# Altium PCB PCB_TUNDRA.PcbDoc
Units mil, origin at the board's own origin, x right, y up, seen from the top; angles counter-clockwise.
Board outline 2560 x 1205 mil, 4 copper layers (Top Layer, Mid-Layer 1, Mid-Layer 14, Bottom Layer); 133 components, 87 nets, 418 pads, 63 vias.
Unrouted connection lines stored in the file: 59.
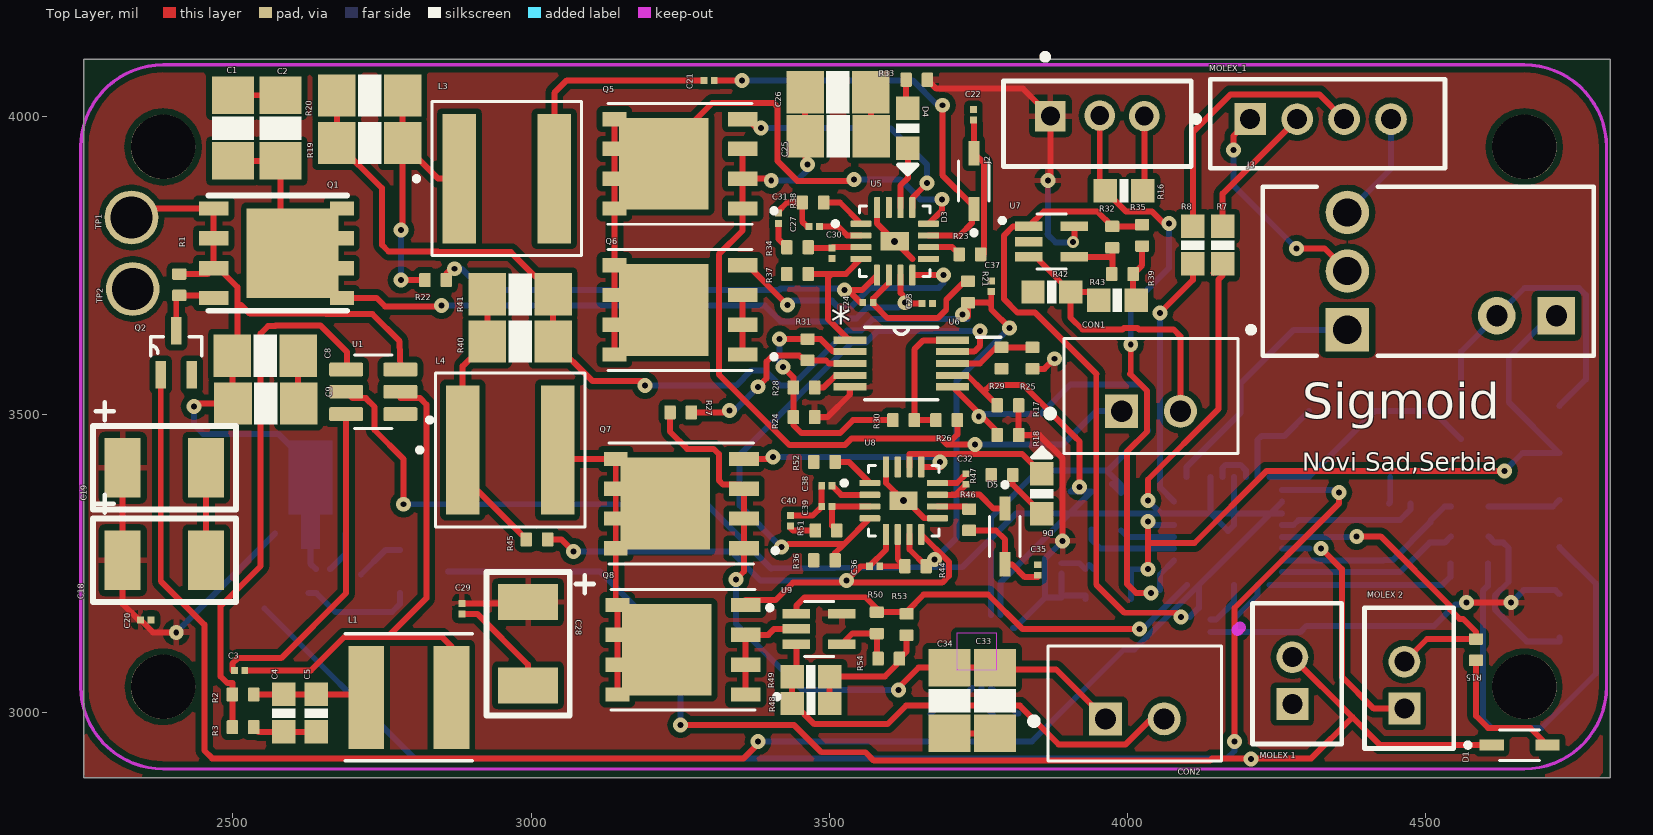
[diagram p0: Top Layer view]
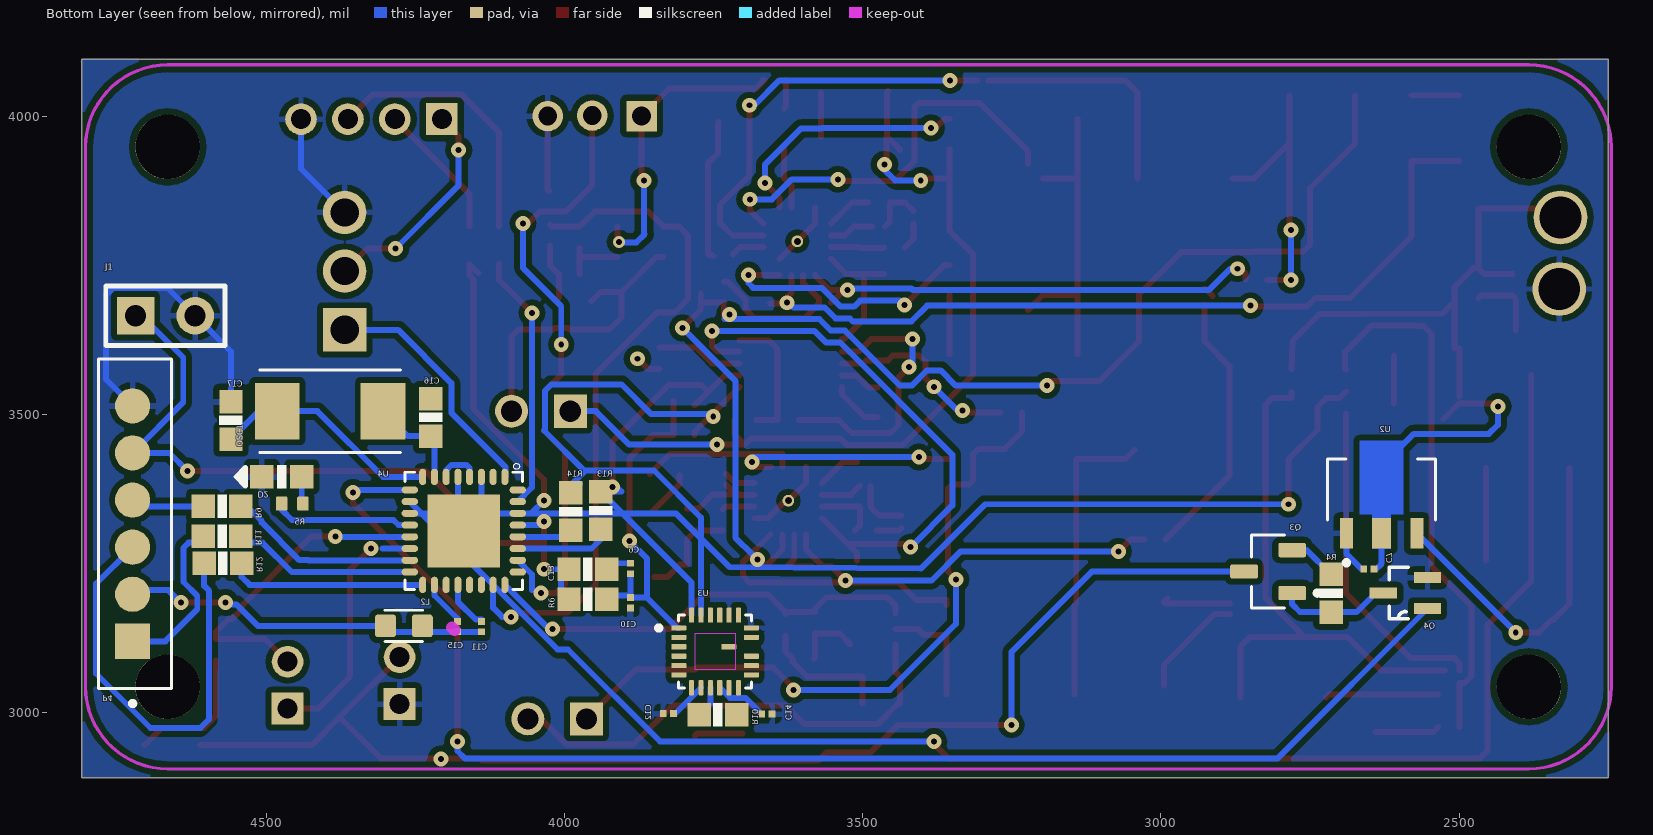
[diagram p1: Bottom Layer view, seen from below]
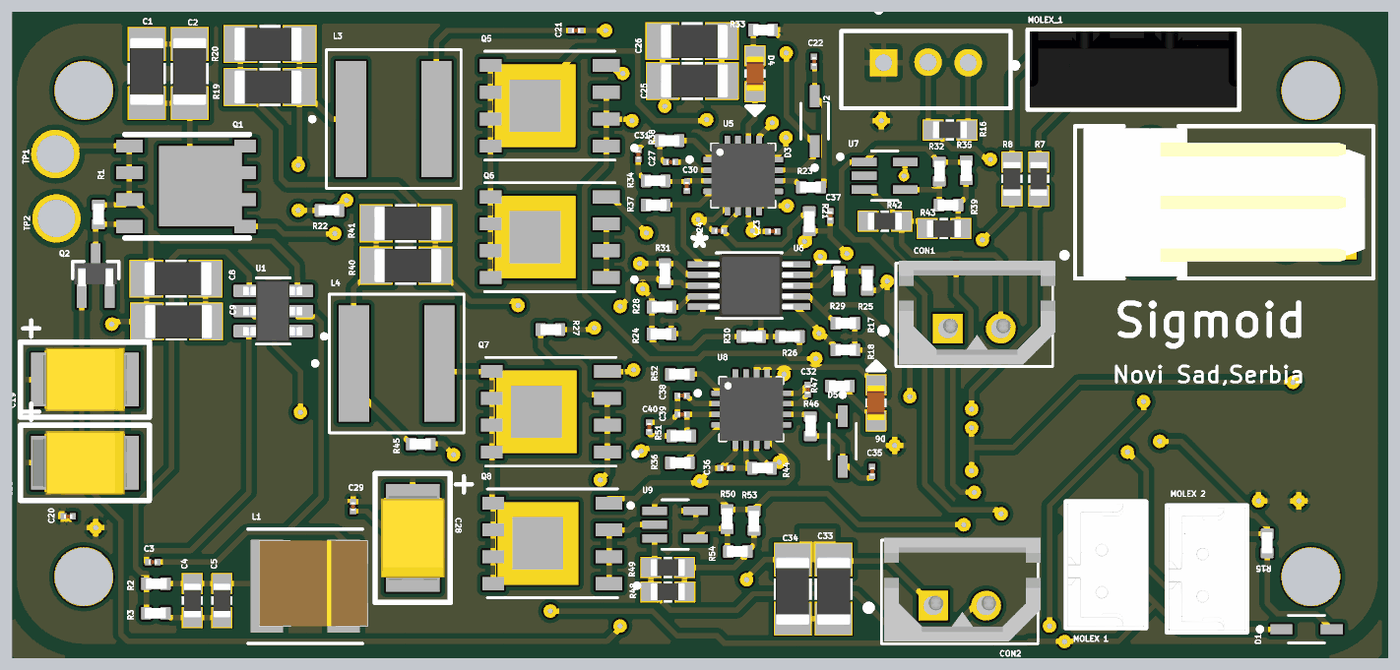
[diagram p2: 3D render of the assembled board from above, using the file's embedded part models]
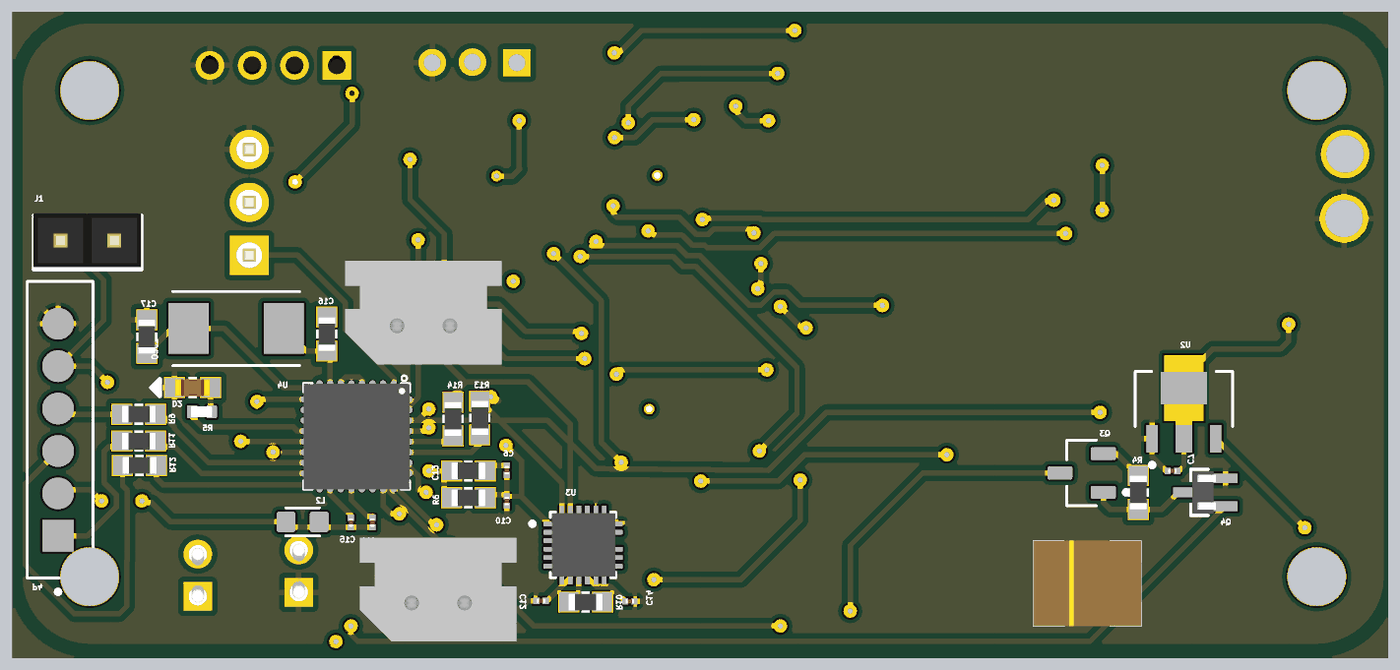
[diagram p3: 3D render of the assembled board from below, using the file's embedded part models]

## Layer stack, top to bottom
Top Solder: solder mask 0.4, Solder Resist, Dk 3.5
Top Layer: signal copper 1.4
Dielectric 1: dielectric 12.6, FR-4, Dk 4.8
Mid-Layer 1: signal copper 1.4
Dielectric3: dielectric 12.6, FR-4, Dk 4.8
Mid-Layer 14: signal copper 1.4
Dielectric2: dielectric 12.6, FR-4, Dk 4.8
Bottom Layer: signal copper 1.4
Bottom Solder: solder mask 0.4, Solder Resist, Dk 3.5

## Board outline
2250,4095 4810,4095 4810,2890 2250,2890 2250,4065 2250,4075

## Design rules (kind name [scope] priority, off if disabled: settings)
Clearance [All] p1: gap=10 ignorepadtopadclearanceinfootprint=FALSE except(0: Arc-Hole Track-Hole SMDPad-Hole THPad-Hole Via-Hole Fill-Hole Poly-Hole Region-Hole Text-Hole)
PolygonConnect [All] p1: connectstyle=Relief reliefconductorwidth=10 reliefentries=4 polygonreliefangle="90 Angle" airgapwidth=10
RoutingVias [All] p1: holewidth=28 width=50 viastyle="Through Hole" minholewidth=28 minwidth=50 maxholewidth=28 maxwidth=50
SolderMaskExpansion [All] p1: expansion=4
Width [All] p1: maxlimit=10 minlimit=10 preferedwidth=10
30 further rules are at their usual default settings.

## Classes and differential pairs
component class U_Power_supply: C1 C2 C3 C4 C5 C6 C7 C8 C9 CON1 CON2 D1 "MOLEX 1" Q1 Q2 Q3 Q4 R1 R2 R3 R4 TP1 TP2 U1 U2
component class U_CPU: C10 C11 C12 C13 C14 C15 C16 C17 C18 C19 C20 D2 J1 J2 J3 L2 "MOLEX 2" MOLEX_1 OSC1 P4 R5 R6 R7 R8 R9 R10 R11 R12 R13 R14 R15 R16 R17 R18 U3 U4
component class U_Buster_Controller: C21 C22 C23 C24 C25 C26 C27 C28 C29 C30 C31 C32 C33 C34 C35 C36 C37 C38 C39 C40 D3 D4 D5 D6 L3 L4 Q5 Q6 Q8 R19 R20 R22 R23 R24 R25 R26 R27 R28 R29 R30 R31 R32 R33 R34 R35 R36 R37 R38 R39 R40 R41 R42 R43 R44 R45 R46 R47 R48 R49 R50 R51 R52 R53 R54 U5 U6 U7 U8 U9

## Components (designator, comment, footprint, x,y, rotation, side; value= is the part's Value field where it differs from the comment)
C1 "SMD Capacitor" "Capacitor SMD 1206" 2500.09,3980.61 r270 top value=22u
C2 "SMD Capacitor" "Capacitor SMD 1206" 2580.09,3980.61 r270 top value=22u
C3 "GRM0225C1E4R6CA03L_1" CAPC0402X22N 2511.26,3070 r180 top value=100n
C4 "SMD Capacitor" "Capacitor SMD 0603" 2585.08,2998.28 r90 top value=22u
C5 "SMD Capacitor" "Capacitor SMD 0603" 2640.08,2998.28 r90 top value=22u
C6 "GRM0225C1E4R6CA03L_1" CAPC0402X22N 3890,3241.26 r90 bottom value=1u
C7 "GRM0225C1E4R6CA03L_1" CAPC0402X22N 2651.26,3240 r0 bottom value=1u
C8 "SMD Capacitor" "Capacitor SMD 1206" 2555,3598 r180 top value=22u
C9 "SMD Capacitor" "Capacitor SMD 1206" 2556,3518 r180 top value=22u
C10 "GRM0225C1E4R6CA03L_1" CAPC0402X22N 3890,3183.74 r270 bottom value=0.1u
C11 "GRM0225C1E4R6CA03L_1" CAPC0402X22N 4140,3143.74 r270 bottom value=100n
C12 "GRM0225C1E4R6CA03L_1" CAPC0402X22N 3826.26,2998 r0 bottom value=10n
C13 "SMD Capacitor" "Capacitor SMD 0603" 3961.27,3240.08 r0 bottom value=100n
C14 "GRM0225C1E4R6CA03L_1" CAPC0402X22N 3661,2997 r180 bottom value=0.1u
C15 "GRM0225C1E4R6CA03L_1" CAPC0402X22N 4180,3143.74 r270 bottom value=100n
C16 "SMD Capacitor" "Capacitor SMD 0603" 4225,3495 r270 bottom value=22p
C17 "SMD Capacitor" "Capacitor SMD 0603" 4560,3490 r270 bottom value=22p
C18 "SMD Tantalum Capacitor (B)" "B Size Capacitor" 2315,3255 r0 top value=1uF
C19 "SMD Tantalum Capacitor (B)" "B Size Capacitor" 2315,3410 r0 top value=1uF
C20 "GRM0225C1E4R6CA03L_1" CAPC0402X22N 2353.74,3155 r0 top value=100n
C21 "GRM0225C1E4R6CA03L_1" CAPC0402X22N 3298.74,4060 r0 top value=100n
C22 "GRM0225C1E4R6CA03L_1" CAPC0402X22N 3742,4002.26 r90 top value=10u
C23 "GRM0225C1E4R6CA03L_1" CAPC0402X22N 3664.74,3686 r0 top value=100n
C24 "GRM0225C1E4R6CA03L_1" CAPC0402X22N 3565.26,3687 r180 top value=100p
C25 "SMD Capacitor" "Capacitor SMD 1206" 3516,3966 r180 top value=10u
C26 "SMD Capacitor" "Capacitor SMD 1206" 3515.61,4039.91 r180 top value=10u
C27 "GRM0225C1E4R6CA03L_1" CAPC0402X22N 3475,3815 r180 top value=4n7
C28 "SMD Tantalum Capacitor (B)" "B Size Capacitor" 2995,3185 r270 top value=10uF
C29 "GRM0225C1E4R6CA03L_1" CAPC0402X22N 2884,3173.74 r270 top value=0.1u
C30 "GRM0225C1E4R6CA03L_1" CAPC0402X22N 3505,3770 r270 top value=270p
C31 "GRM0225C1E4R6CA03L_1" CAPC0402X22N 3415,3828.74 r90 top value=4n7
C32 "GRM0225C1E4R6CA03L_1" CAPC0402X22N 3730,3391.26 r270 top value=100n
C33 "SMD Capacitor" "Capacitor SMD 1206" 3778.2,3019 r90 top value=10u
C34 "SMD Capacitor" "Capacitor SMD 1206" 3702,3019 r90 top value=10u
C35 "GRM0225C1E4R6CA03L_1" CAPC0402X22N 3850,3238.74 r90 top value=10u
C36 "GRM0225C1E4R6CA03L_1" CAPC0402X22N 3576.26,3245 r180 top value=100p
C37 "GRM0225C1E4R6CA03L_1" CAPC0402X22N 3772,3714.74 r90 top value=100n
C38 "GRM0225C1E4R6CA03L_1" CAPC0402X22N 3496.26,3380 r180 top value=4n7
C39 "GRM0225C1E4R6CA03L_1" CAPC0402X22N 3496.26,3345 r180 top value=270p
C40 "GRM0225C1E4R6CA03L_1" CAPC0402X22N 3435,3321.26 r90 top value=4n7
CON1 "MOLEX_22_03_5025" MOLEX_22-03-5025 4040,3505 r0 top
CON2 "MOLEX_22_03_5025" MOLEX_22-03-5025 4012.79,2989 r0 top
D1 "SD12-7" SOD323 4658.15,2945 r0 top
D2 "SMD LED" "SMD LED Diode" 4475,3395 r0 bottom
D3 "BO540WS-7" SOD323 3743,3891 r90 top
D4 "SMD LED" "SMD LED Diode" 3631.96,3979.24 r270 top
D5 "B054WS-7" SOD323 3795,3295 r270 top
D6 "SMD LED" "SMD LED Diode" 3857.04,3366.83 r90 top
J1 "Jumper 2 Pole" "Jumper 2 Pole" 4670,3665 r180 bottom
J2 "53253-0370" Molex_53253-0370_0 3950,4000 r0 top
J3 "SERVO CONNECTOR" Molex_22-05-1032_0 4505,3740 r270 top
L1 "SRN5040TA-150M" IND_A-150M 2795,3025 r0 top
L2 "XAL6060-472ME" INDC1608X95N 4269.91,3145 r180 bottom value=10u
L3 "XAL6060-472ME" IND_XAL6060-472ME 2959.53,3895 r0 top value=4u7
L4 "XAL6060-472ME" IND_XAL6060-472ME 2965,3440 r0 top value=4u7
"MOLEX 1" "CONN HEADER VERT 2POS 2MM" TE_Connectivity_0_MFG 4285,3065 r90 top
"MOLEX 2" "CONN HEADER VERT 2POS 2MM" TE_Connectivity_0_MFG 4472.87,3057.44 r90 top
MOLEX_1 "292161-4" TE_292161-4_0 4336.18,3987.13 r0 top
OSC1 "SMD Crystal Oscillator" XTAL_ECS-080-18-23G-JGN-TR 4393.58,3505 r0 bottom value=8MHz
P4 "ICSP PROGRAMMING" "ICSP Programming 6X1 (2mm)" 4725,3119.02 r90 bottom
Q1 "SI7149ADP-T1-GE3" POWERPAKSO-8 2575.3,3770 r0 top
Q2 "BSS138PW,115" SOT65P210X110-3N 2405,3603 r90 top
Q3 "DMG2305UX-7" "SOT91P240X110-3N_DMG2305UX-7 - duplicate" 2820.35,3236.02 r0 bottom
Q4 "BSS138PW,115" SOT65P210X110-3N 2590,3200 r0 bottom
Q5 "SIR184DP-T1-RE3" TRANS_SIR184DP-T1-RE3 3250,3920 r180 top
Q6 "SIR184DP-T1-RE3" TRANS_SIR184DP-T1-RE3 3250,3675 r180 top
Q7 "SIR184DP-T1-RE3" TRANS_SIR184DP-T1-RE3 3252.17,3350 r180 top
Q8 "SIR184DP-T1-RE3" TRANS_SIR184DP-T1-RE3 3255,3105 r180 top
R1 "SMD Resistor" RESC1005X35N 2410,3717.09 r90 top
R2 "SMD Resistor" RESC1005X35N 2517.09,3030 r0 top value=56k
R3 "SMD Resistor" RESC1005X35N 2517.09,2975 r180 top value=10k
R4 "SMD Resistor" "Resistor SMD 0603" 2715,3200 r270 bottom value=105k
R5 "SMD Resistor" RESC1005X35N 4457.09,3350 r0 bottom value=330R
R6 "SMD Resistor" "Resistor SMD 0603" 3961.81,3189.74 r180 bottom
R7 "SMD Resistor" "Resistor SMD 0603" 4160.26,3783.19 r90 top value=100R
R8 "SMD Resistor" "Resistor SMD 0603" 4110.26,3783.19 r90 top value=100R
R9 "SMD Resistor" "Resistor SMD 0603" 4575,3345 r180 bottom value=100R
R10 "SMD Resistor" "Resistor SMD 0603" 3743,2996 r0 bottom value=10k
R11 "SMD Resistor" "Resistor SMD 0603" 4575,3295 r180 bottom value=100R
R12 "SMD Resistor" "Resistor SMD 0603" 4573.82,3249.74 r180 bottom value=100R
R13 "SMD Resistor" "Resistor SMD 0603" 3940.26,3338.82 r270 bottom value=100R
R14 "SMD Resistor" "Resistor SMD 0603" 3990.26,3336.81 r270 bottom value=100R
R15 "SMD Resistor" RESC1005X35N 4585,3105 r90 top value=6.8k
R16 "SMD Resistor" "Resistor SMD 0603" 3995,3875 r180 top value={value}
R17 "SMD Resistor" RESC1005X35N 3800,3515 r0 top value=4.7k
R18 "SMD Resistor" RESC1005X35N 3800,3465 r0 top value=4.7k
R19 "SMD Resistor" "Resistor SMD 1206" 2730,3955 r0 top value=10m
R20 "SMD Resistor" "Resistor SMD 1206" 2730,4035 r0 top value=10m
R21 "SMD Resistor" RESC1005X35N 3733,3705 r270 top value=10R
R22 "SMD Resistor" RESC1005X35N 2840,3725 r180 top value=10R
R23 "SMD Resistor" RESC1005X35N 3736.14,3768.23 r180 top value=2R
R24 "SMD Resistor" RESC1005X35N 3457.91,3495 r180 top value=10k
R25 "SMD Resistor" RESC1005X35N 3841,3594.09 r90 top value=10k
R26 "SMD Resistor" RESC1005X35N 3697.09,3490 r180 top value=160k
R27 "SMD Resistor" RESC1005X35N 3251.09,3503 r0 top value=160k
R28 "SMD Resistor" RESC1005X35N 3457.91,3545 r0 top value=10k
R29 "SMD Resistor" RESC1005X35N 3789,3594.09 r270 top value=10k
R30 "SMD Resistor" RESC1005X35N 3625,3490 r0 top value=0R
R31 "SMD Resistor" RESC1005X35N 3464,3608.09 r270 top value=0R
R32 "SMD Resistor" RESC1005X35N 3975,3797.09 r90 top value=47k
R33 "SMD Resistor" RESC1005X35N 3647,4061 r0 top value=330R
R34 "SMD Resistor" RESC1005X35N 3447.09,3735 r0 top value=11k
R35 "SMD Resistor" RESC1005X35N 4025,3800 r270 top value=10k
R36 "SMD Resistor" RESC1005X35N 3492.09,3255 r0 top value=11k
R37 "SMD Resistor" RESC1005X35N 3447.09,3780 r180 top value=6k8
R38 "SMD Resistor" RESC1005X35N 3472.91,3855 r180 top value=105k
R39 "SMD Resistor" RESC1005X35N 3992.09,3735 r180 top value=1k2
R40 "SMD Resistor" "Resistor SMD 1206" 2981.39,3621.72 r180 top value=10m
R41 "SMD Resistor" "Resistor SMD 1206" 2981.39,3700.72 r180 top value=10m
R42 "SMD Resistor" "Resistor SMD 0603" 3873.19,3704.74 r0 top value=47m
R43 "SMD Resistor" "Resistor SMD 0603" 3983.82,3691.26 r180 top value=47m
R44 "SMD Resistor" RESC1005X35N 3645,3245 r0 top value=10R
R45 "SMD Resistor" RESC1005X35N 3010,3290 r180 top value=10R
R46 "SMD Resistor" RESC1005X35N 3735,3322.91 r90 top value=2R
R47 "SMD Resistor" RESC1005X35N 3790,3398.07 r180 top value=330R
R48 "SMD Resistor" "Resistor SMD 0603" 3470,3015 r180 top value=47m
R49 "SMD Resistor" "Resistor SMD 0603" 3469.81,3060.26 r180 top value=47m
R50 "SMD Resistor" RESC1005X35N 3580,3150 r90 top value=47k
R51 "SMD Resistor" RESC1005X35N 3495,3305 r180 top value=6k8
R52 "SMD Resistor" RESC1005X35N 3492.09,3420 r180 top value=105k
R53 "SMD Resistor" RESC1005X35N 3630,3147.09 r270 top value=10k
R54 "SMD Resistor" RESC1005X35N 3600,3090 r180 top value=1k2
TP1 "Test Point" "TEST POINT" 2330,3830 r0 top
TP2 "Test Point" "TEST POINT" 2332,3710 r0 top
U1 "TPS562208DDCT" SOT95P280X110-6N 2735.47,3537.6 r180 top
U2 "AP7380-33Y-13" VREG_AP7380-33Y-13 2630,3365 r90 bottom
U3 "MPU-9250" QFN40P300X300X105-24N 3748,3102 r180 bottom
U4 "ATMEGA328P-MU" QFN50P500X500X100-33N 4169.45,3304.21 r270 bottom
U5 "TPS43060RTER" QFN50P300X300X80-17N 3610,3790 r0 top
U6 "AD5243" SOP50P490X110-10N 3621,3585 r0 top
U7 "MCP6421" SOT65P210X110-5N 3873.19,3789.41 r0 top
U8 "TPS43060RTER" QFN50P300X300X80-17N 3625,3355 r0 top
U9 "MCP6421" SOT65P210X110-5N 3483.19,3140 r0 top

## Footprints (in the part's own frame and the unit in brackets; to place one, negate y for a bottom-side part, rotate by r counter-clockwise, add the part's x,y. Pads: shape width x height; smd on the part's side, far side on the other; paste and mask are expansions set on the pad)
"B Size Capacitor" [mil] "SMD Tantalum Capacitor B Size"
  rect 60x100 smd: 1(0,0) 2(140,0)
  silkscreen extent -50,-70 190,110, body extent -28,-59 169,59, height 83
"Capacitor SMD 0603" [mm] "Capacitor SMD 0603"
  rect 1x1 smd paste-0.05 mask+0.05: 1(-0.794,0.002) 2(0.806,0.002)
  silkscreen extent -0.19,-0.5 0.21,0.5, body extent -0.79,-0.4 0.81,0.4, height 0.8
"Capacitor SMD 1206" [mm] "Capacitor SMD 1206"
  rect 1.6x1.8 smd paste-0.05 mask+0.05: 1(-1.381,-0.002) 2(1.419,-0.002)
  silkscreen extent -0.48,-0.9 0.52,0.9, body extent -1.68,-0.8 1.52,0.8, height 1.5
CAPC0402X22N [mm]
  rect 0.29x0.3 smd: 1(-0.222,0) 2(0.222,0)
  body extent -0.2,-0.1 0.2,0.1, height 0.22
"ICSP Programming 6X1 (2mm)" [mm]
  rect 1.5x1.5 smd: 1(0,0)
  round 1.5 smd: 2(2.007,0) 3(4.013,0) 4(6.02,0) 5(8.026,0) 6(10.033,0)
  silkscreen extent -2.75,-1.65 12.03,1.45
IND_A-150M [mil]
  rect 60x173 smd paste+0 mask+0: 1(-71.5,0) 2(71.5,0)
  silkscreen extent -106,-106 106,106, body extent -87,-75 116,86, height 102
IND_XAL6060-472ME [mm]
  rect 1.43x5.5 smd: 1(-2.02,0) 2(2.02,0)
  silkscreen extent -3.95,-3.28 3.18,3.28
INDC1608X95N [mm]
  rrect30% 0.9x0.97 smd: 1(-0.785,0) 2(0.785,0)
  silkscreen extent -0.8,-0.66 0.8,0.66
"Jumper 2 Pole" [mm] "Jumper 2 Pole"
  rect 1.6x1.6 hole 0.9 paste-0.05 mask+0.05: 1(-1.27,0.003)
  round 1.6 hole 0.9 paste-0.05 mask+0.05: 2(1.27,0.003)
  silkscreen extent -2.54,-1.27 2.54,1.27, body extent -2.55,-1.17 2.53,1.37, height 8.29
MOLEX_22-03-5025 [mm]
  rect 1.408x1.408 hole 0.9: 1(-1.25,0)
  round 1.408 hole 0.9: 2(1.25,0)
  silkscreen extent -4.44,-1.8 3.7,3.1, body extent -3.57,-1.69 3.83,3.21, height 2.95
Molex_22-05-1032_0 [mm]
  rect 1.85x1.85 hole 1.2 paste-1000 mask+0: 1(2.5,-3.45)
  round 1.85 hole 1.2 paste-1000 mask+0: 2(0,-3.45) 3(-2.5,-3.45)
  silkscreen extent -3.6,-7.67 3.6,7.05, body extent -3.7,-7.15 3.7,7.15, height 0.25
Molex_53253-0370_0 [mm]
  rect 1.3x1.3 hole 0.8 paste-1000 mask+0: 1(-2,0)
  round 1.3 hole 0.8 paste-1000 mask+0: 2(0.102,0.025) 3(2,0)
  silkscreen extent -4,-2.15 4,2.65
POWERPAKSO-8 [mm]
  rect 1.27x0.61 smd: 1(-2.732,1.905) 2(-2.732,0.635) 3(-2.732,-0.635) 4(-2.732,-1.905)
  rect 1.02x0.61 smd: 5(2.732,-1.905) 6(2.732,-0.635) 7(2.732,0.635) 8(2.732,1.905)
  rect 3.91x3.81 smd: 9(0.627,0)
  silkscreen extent -2.95,-2.45 2.95,2.45
QFN40P300X300X105-24N [mm]
  rrect25% 0.64x0.22 smd: 1(-1.545,1) 2(-1.545,0.6) 3(-1.545,0.2) 4(-1.545,-0.2) 5(-1.545,-0.6) 6(-1.545,-1) 13(1.545,-1) 14(1.545,-0.6) 15(1.545,-0.2) 16(0.584,0.203) 17(1.545,0.6) 18(1.545,1)
  rrect25% 0.22x0.64 smd: 7(-1,-1.545) 8(-0.6,-1.545) 9(-0.2,-1.545) 10(0.2,-1.545) 11(0.6,-1.545) 12(1,-1.545) 19(1,1.545) 20(0.6,1.545) 21(0.2,1.545) 22(-0.2,1.545) 23(-0.6,1.545) 24(-1,1.545)
  Keep-Out Layer region: 0.85,-0.77 -0.85,-0.77 -0.85,0.77 0.85,0.77
  Keep-Out Layer region: 0.85,-0.77 -0.85,-0.77 -0.85,0.77 0.85,0.77
  silkscreen extent -2.5,-1.55 1.55,1.55, body extent -1.47,-1.5 1.53,1.5, height 1
QFN50P300X300X80-17N [mm]
  rrect25% 0.89x0.26 smd: 1(-1.44,0.75) 2(-1.44,0.25) 3(-1.44,-0.25) 4(-1.44,-0.75) 9(1.44,-0.75) 10(1.44,-0.25) 11(1.44,0.25) 12(1.44,0.75)
  rrect25% 0.26x0.89 smd: 5(-0.75,-1.44) 6(-0.25,-1.44) 7(0.25,-1.44) 8(0.75,-1.44) 13(0.75,1.44) 14(0.25,1.44) 15(-0.25,1.44) 16(-0.75,1.44)
  rect 1.2x0.8 smd paste-2: 17(0,0)
  round 0.5 hole 0.3: 18(0,0)
  silkscreen extent -2.63,-1.5 1.5,1.5, body extent -1.5,-1.5 1.5,1.5, height 0.8
QFN50P500X500X100-33N [mm]
  oval 0.7x0.3 smd mask+0: 1(-2.3,1.75) 2(-2.3,1.25) 3(-2.3,0.75) 4(-2.3,0.25) 5(-2.3,-0.25) 6(-2.3,-0.75) 7(-2.3,-1.25) 8(-2.3,-1.75) 17(2.3,-1.75) 18(2.3,-1.25) 19(2.3,-0.75) 20(2.3,-0.25) 21(2.3,0.25) 22(2.3,0.75) 23(2.3,1.25) 24(2.3,1.75)
  oval 0.3x0.7 smd mask+0: 9(-1.75,-2.3) 10(-1.25,-2.3) 11(-0.75,-2.3) 12(-0.25,-2.3) 13(0.25,-2.3) 14(0.75,-2.3) 15(1.25,-2.3) 16(1.75,-2.3) 25(1.75,2.3) 26(1.25,2.3) 27(0.75,2.3) 28(0.25,2.3) 29(-0.25,2.3) 30(-0.75,2.3) 31(-1.25,2.3) 32(-1.75,2.3)
  rect 3.1x3.1 smd paste-3: 33(0,0)
  silkscreen extent -2.88,-2.5 2.5,2.5, body extent -2.5,-2.5 2.5,2.5, height 0.48
RESC1005X35N [mm]
  rrect20% 0.49x0.6 smd: 1(-0.455,0) 2(0.455,0)
  body extent -0.47,-0.25 0.53,0.25, height 0.18
"Resistor SMD 0603" [mm] "Resistor SMD 0603"
  rect 1x1 smd paste-0.05 mask+0.05: 1(-0.792,0.007) 2(0.808,0.007)
  silkscreen extent -0.19,-0.49 0.21,0.51, body extent -0.79,-0.39 0.81,0.41, height 0.8
"Resistor SMD 1206" [mm] "Resistor SMD 1206"
  rect 1.6x1.8 smd paste-0.05 mask+0.05: 1(-1.412,-0.007) 2(1.388,-0.007)
  silkscreen extent -0.51,-0.91 0.49,0.89, body extent -1.71,-0.81 1.49,0.79, height 1.5
"SMD LED Diode" [mm] "SMD LED (Red, Low Current Type)"
  rect 1x1 smd paste-0.05 mask+0.05: 1(-0.858,0.001) 2(0.842,0.001)
  silkscreen extent -0.21,-0.5 1.94,0.5, body extent -0.82,-0.4 0.8,0.4, height 1.1
SOD323 [mm]
  rect 1.04x0.46 smd: A(1.19,0) C(-1.19,0)
  silkscreen extent -2.3,-0.65 0.85,0.65
SOP50P490X110-10N [mil]
  rect 56x12 smd: 1(-86,39) 2(-86,20) 3(-86,0) 4(-86,-20) 5(-86,-39) 6(86,-39) 7(86,-20) 8(86,0) 9(86,20) 10(86,39)
  silkscreen extent -61,-61 167,61, body extent -93,-59 99,59, height 19
SOT65P210X110-3N [mil]
  rect 46x18 smd: 1(-37,26) 2(-37,-26) 3(37,0)
  silkscreen extent -5,-43 27,43, body extent -19,-39 24,39, height 41
SOT65P210X110-5N [mm]
  rect 1.17x0.4 smd: 1(-0.97,0.65) 2(-0.97,0) 3(-0.97,-0.65) 4(0.97,-0.65) 5(0.97,0.65)
  silkscreen extent -2.2,-1.17 0.63,1.17
"SOT91P240X110-3N_DMG2305UX-7 - duplicate" [mm]
  rrect25% 1.18x0.61 smd: 1(-1.025,0.915) 2(-1.025,-0.915) 3(1.025,0)
  silkscreen extent -2.2,-1.55 0.7,1.55
SOT95P280X110-6N [mm]
  rrect25% 1.45x0.59 smd: 1(-1.155,0.95) 2(-1.155,0) 3(-1.155,-0.95) 4(1.155,-0.95) 5(1.155,0) 6(1.155,0.95)
  silkscreen extent -2.5,-1.57 0.8,1.57, body extent -1.37,-1.45 1.43,1.45, height 1.1
TE_292161-4_0 [mm]
  rect 1.35x1.35 hole 0.85 paste-1000 mask+0: 1(-3.3,0.2)
  round 1.35 hole 0.85 paste-1000 mask+0: 2(-1.3,0.2) 3(0.7,0.2) 4(2.7,0.2)
  silkscreen extent -5.72,-1.9 5,1.9, body extent -5.1,-2 5.1,2, height 0.25
TE_Connectivity_0_MFG [mm]
  rect 1.35x1.35 hole 0.85 paste-1000 mask+0: 1(-1.3,0.2)
  round 1.35 hole 0.85 paste-1000 mask+0: 2(0.7,0.2)
  silkscreen extent -3,-1.9 3,1.9, body extent -3.1,-2 3.1,2, height 0.25
"TEST POINT" [mil] "Test point"
  round 90 hole 70 mask+1: 1(0,0)
TRANS_SIR184DP-T1-RE3 [mm]
  rect 1.27x0.61 smd: 1(-2.67,1.905) 2(-2.67,0.635) 3(-2.67,-0.635) 4(-2.67,-1.905)
  rect 1.02x0.61 smd: 5(2.795,-1.905) 6(2.795,-0.635) 7(2.795,0.635) 8(2.795,1.905)
  rect 3.81x3.91 smd paste-3: 9(0.69,0)
  silkscreen extent -4.1,-2.58 3.08,2.58
VREG_AP7380-33Y-13 [mm]
  rect 1.3x0.55 smd: 1(-1.65,1.5) 3(-1.65,-1.5)
  rect 1.3x0.8 smd: 2(-1.65,0)
  Top Layer region: 2.3,-0.925 -0.825,-0.925 -0.825,-0.4 -2.3,-0.4 -2.3,0.4 -0.825,0.4 -0.825,0.925 2.3,0.925
  silkscreen extent -3,-2.3 1.53,2.3
XTAL_ECS-080-18-23G-JGN-TR [mm]
  rect 1.9x2.4 smd: 1(-2.25,0) 2(2.25,0)
  silkscreen extent -3,-1.75 3,1.75

## Part data
C3 C6 C7 C10 C11 C12 C14 C15 C20 C21 C22 C23 C24 C27 C29 C30 C31 C32 C35 C36 C37 C38 C39 C40: "SMD Capacitor C0G(EIA) with Capacitance: 4.6pF Tol. 0.25pF. Rated Voltage: 25Vdc", Package=None, Availability=Unavailable, MP=GRM0225C1E4R6CA03L, Price=None
C18 C19 C28: library part "SMD Tantalum Capacitor (B)_1", Package="SMD 3528 (B)"
CON1 CON2: library part "KONEKTOR 2-POLNI_X8Y6", "KONEKTOR 2 MOLEX"
D1: library part MBRS340, "Diode, Signal, TVS, 12V, Unidir. (SOD323)", Package="DO-214 ON Semiconductor", Availability=Unavailable, DigiKey-Purchase-URL=https://snapeda.com/shop?store=DigiKey&id=1473135, MF="ON Semiconductor", MP=MBRS340, Price=None, SnapEDA_Link=https://www.snapeda.com/parts/MBRS340/ON%20Semiconductor/view-part/1473135/?ref=snap
D2 D4 D6: library part "SMD LED Diode", "SMD LED (Red, Low Current Type)"
D3: library part MBRS340, "Diode, Signal, Schottky  (SOD-323)", Package="DO-214 ON Semiconductor", Availability=Unavailable, DigiKey-Purchase-URL=https://snapeda.com/shop?store=DigiKey&id=1473135, MF="ON Semiconductor", MP=MBRS340, Price=None, SnapEDA_Link=https://www.snapeda.com/parts/MBRS340/ON%20Semiconductor/view-part/1473135/?ref=snap
D5: library part MBRS340, "Diode, Signa, Schottky (SOD-323)", Package="DO-214 ON Semiconductor", Availability=Unavailable, DigiKey-Purchase-URL=https://snapeda.com/shop?store=DigiKey&id=1473135, MF="ON Semiconductor", MP=MBRS340, Price=None, SnapEDA_Link=https://www.snapeda.com/parts/MBRS340/ON%20Semiconductor/view-part/1473135/?ref=snap
J3: library part 22-05-1032
L1: "Fixed Inductors 3.3uH 20% SMD 5040", =4.7u, Built_By=EMA_Matt, Copyright="Copyright (C) 2018 Accelerated Designs. All rights reserved", Manufacturer_Part_Number=SRN5040TA-150M, RefDes=RefDes, SourceLibrary=Bourns_Electronics_2019-12-18, Type=DEV, Vendor="Bourns Electronics"
L2 L3 L4: "Power inductor, shielded, 20% tol, SMT, RoHS, halogen f", Package=None, Availability=Unavailable, MP=XAL6060-472ME, Price=None
"MOLEX 1" "MOLEX 2": library part 53253-0270, "Connector Header Through Hole 2 position 0.079\" (2.00mm)"
MOLEX_1: "Post Header Assembly, 4 Position, Vertical, 2mm Pitch, DIP Standard Type"
P4: "POGO con6, pitch 2mm, Fi cc 1.5mm", Package=None, Availability=Unavailable, MP=2267063-6, Price=None
Q1: "P-Channel 30V 50A (Tc) 5W (Ta), 48W (Tc) Surface Mount PowerPAK® SO-8", Package="SO-8 Vishay", Availability=Good, Check_prices=https://www.snapeda.com/parts/SI7149ADP-T1-GE3/Vishay%20Siliconix/view-part/415842/?ref=eda, MF="Vishay Siliconix", MP=SI7149ADP-T1-GE3, Price=None, Purchase-URL=https://pricing.snapeda.com/search/part/SI7149ADP-T1-GE3/?ref=eda, SnapEDA_Link=https://www.snapeda.com/parts/SI7149ADP-T1-GE3/Vishay%20Siliconix/view-part/415842/?ref=snap
Q2 Q4: "N-Channel 60V 320mA _Ta_ 260mW _Ta_, 830mW _Tc_ Surface Mount SC-70", Package="SOT-323 NXP Semiconductors", Digi-Key_Part_Number=1727-1143-1-ND, Digi-Key_Purchase_URL=https://www.digikey.com/product-detail/en/nexperia-usa-inc/BSS138PW,115/1727-1143-1-ND/4162472?utm_source=snapeda&utm_medium=aggregator&utm_campaign=symbol, MF="Nexperia USA", MP=BSS138PW,115, SnapEDA_Link=https://www.snapeda.com/parts/BSS138PW%2C115/Nexperia%20USA%20Inc./view-part/209423/?ref=snap
Q3: "P-Channel 20V 4.2A _Ta_ 1.4W _Ta_ Surface Mount SOT-23", Package="TO-236-3 Power Analog Micro", Availability=Unavailable, MF="Power Analog Micro", MP=DMG2305UX-7, Price=None, SnapEDA_Link=https://www.snapeda.com/parts/DMG2305UX-7/Power%20Analog%20Micro/view-part/174848/?ref=snap
Q5 Q6 Q7 Q8: Package=None, Availability=Unavailable, MP=SIR184DP-T1-RE3, Price=None
TP1 TP2: "Test point"
U1: "4.5 V to 17 V input, 2 A output, synchronous step-down converter in FCCM mode 6-SOT-23-THIN -40 to 125", Package="SOT-23-THN-6 Texas Instruments", Availability=Good, DigiKey-Purchase-URL=https://snapeda.com/shop?store=DigiKey&id=652146, MF="Texas Instruments", Mouser-Purchase-URL=https://snapeda.com/shop?store=Mouser&id=652146, MP=TPS562208DDCT, Price=None, SnapEDA_Link=https://www.snapeda.com/parts/TPS562208DDCT/Texas%20Instruments/view-part/652146/?ref=snap, Texas_Instruments-Purchase-URL=https://snapeda.com/shop?store=Texas+Instruments&id=652146
U2: "LDO Regulator Pos 3.3V 0.15A 4-Pin(3+Tab) SOT-89 T/R", Package=None, Arrow_Electronics-Purchase-URL=https://snapeda.com/shop?store=Arrow+Electronics&id=4834117, Availability=Unavailable, MF="Diodes Incorporated", Mouser-Purchase-URL=https://snapeda.com/shop?store=Mouser&id=4834117, MP=AP7380-33Y-13, Price=None, SnapEDA_Link=https://www.snapeda.com/parts/AP7380-33Y-13/Diodes%20Inc./view-part/4834117/?ref=snap
U3: "Accelerometer, Gyroscope, Magnetometer, 9 Axis Sensor I²C, SPI Output", Package="TFQFN-24 TDK InvenSense", Availability=Unavailable, MF="TDK InvenSense", MP=MPU-9250, Price=None, SnapEDA_Link=https://www.snapeda.com/parts/MPU-9250/TDK%20InvenSense/view-part/4652549/?ref=snap
U4: "AVR AVR® ATmega Microcontroller IC 8-Bit 20MHz 32KB (16K x 16) FLASH 32-VQFN (5x5)", Package="VQFN-32 Microchip", Availability=Good, Check_prices=https://www.snapeda.com/parts/ATMEGA328P-MU/Microchip/view-part/649548/?ref=eda, MF=Microchip, MP=ATMEGA328P-MU, Price=None, Purchase-URL=https://pricing.snapeda.com/search/part/ATMEGA328P-MU/?ref=eda, SnapEDA_Link=https://www.snapeda.com/parts/ATMEGA328P-MU/Microchip/view-part/649548/?ref=snap
U5 U8: "Low Iq, 58V, Synchronous Boost Controller w/ Wide Input Voltage & 7.5V Gate Drive for Standard FETs 16-WQFN -40 to 150", Package="WQFN-16 Texas Instruments", Availability=Good, MF="Texas Instruments", MP=TPS43060RTER, Price=None, Purchase-URL=https://pricing.snapeda.com/search/part/TPS43060RTER/?ref=eda, SnapEDA_Link=https://www.snapeda.com/parts/TPS43060RTER/Texas%20Instruments/view-part/524817/?ref=snap
U6: library part AD5243BRMZ50-RL7, "Digital Digital Potentiometer 50k Ohm 2 Circuit 256 Taps I²C Interface 10-MSOP", Package="MSOP-10 Analog Devices", Availability=Unavailable, MF="Analog Devices", MP=AD5248BRMZ50-RL7, Price=None, SnapEDA_Link=https://www.snapeda.com/parts/AD5248BRMZ50-RL7/Analog%20Devices%20Inc./view-part/435262/?ref=snap
U7 U9: "General Purpose Amplifier 1 Circuit Rail-to-Rail SC70-5", Package="SOT-23-5 Analog Devices", Availability=Warning, MF="Analog Devices", Mouser-Purchase-URL=https://snapeda.com/shop?store=Mouser&id=4346571, MP=LTC2050HVCS5#TRMPBF, Price=None, SnapEDA_Link=https://www.snapeda.com/parts/LTC2050HVCS5%23TRMPBF/Analog%20Devices/view-part/4346571/?ref=snap
R1: 105k=105k
R6: =10k

## Free pads (board coordinates)
  round 108.27 hole 108.27: 1(2382.8,3042.79) 1(2382.8,3948.31) 1(4666.26,3042.79) 1(4666.26,3948.31)

## Via types
v1: diameter 25, hole 10, Top Layer to Bottom Layer, 62 vias
v2: diameter 20, hole 10, Top Layer to Bottom Layer, 1 vias

## Nets (pads, with @x,y where several pads share a name; then routed paths per layer and width w, separated by ;. In a path a pad name is that pad's centre, name@x,y a point inside that pad or via, vN(x,y) a via of type N, cw(c..) or ccw(c..) an arc to the next point about the centre after c; other vN are vias at no path point)
3V3: C6.1 C10.1 C11.2 C12.1 C18.1 C19.1 C20.1 C28.1 C29.1 J2.1 L2.1 P4.2 R6.2 R17.2 R18.2 R24.1 R25.1 R33.2 R47.2 U2.3 U3.1 U3.8 U3.13 U4.4 U4.6 U6.5 U7.5 U9.5 | length 2654.4
  Top Layer w10: C19.1 C18.1 2315,3181.77 C20.1@2341.77,3155 ; C20.1 2365.91,3134.09 v1(2405,3134.09) ; C29.1 2992.48,3182.48 C28.1 C28.1@2989.26,3190.74 ; R24.1 3497,3495 3535,3533 U6.5 ; R33.2@3668.66,4061 R33.2 3679.91,4046 3825.26,4046 J2.1 v1@3871.26,3892 ; R17.2@3817.91,3521.81 R17.2 R18.2 3852.58,3465 3891.69,3425.9 v1(3891.69,3287.31) ; R25.1 3861.17,3576.17 v1(3878,3593) ; v1@3866,3891 v1(3867,3892) ; v2(3909,3789) 3911.38,3791.38 U7.5 ; v1(4569,3184) v1(4644,3184)
  Bottom Layer w10: v1(2405,3134.09) U2.3 ; U3.8 3814.8,2998 C12.1 ; U3.1 3811.37,3141.37 3862.48,3192.48 ; v1(3867,3892) 3867,3803 3866,3802 3880,3788 v2@3906,3788 ; C10.1 3862.48,3192.48 ; C6.1 3890,3195.71 3930,3195.71 R6.2 ; v1(3891.69,3287.31) 3862.48,3258.11 3862.48,3192.48 ; C11.2 4290.81,3135 L2.1 4515,3145 4551,3181 v1@4566,3181 ; U4.4 4159.61,3409.61 4165,3415 4190,3415 4198.98,3406.02 U4.6 ; v1(4644,3184) 4665,3205 4718.03,3205 P4.2
5V: C4.2 C5.2 J3.2 L1.1 MOLEX_1.1 R2.2 | length 564.1
  Top Layer w10: R2.2 C4.2 C5.2 2718.5,3030 L1.1 ; v1(4178,3943) 4178,3966.74 MOLEX_1.1 ; v1(4284,3778) 4331.17,3778 J3.2
  Bottom Layer w10: v1(4178,3943) 4178,3884 v1(4284,3778)
A1: R24.2 R28.1 R30.1 R31.1 U6.2 | length 461.9
  Top Layer w10: v1(3417,3626) R31.1 3486,3626 3507,3605 U6.2 ; v1@3423,3578.5 3423.5,3578.5 3440,3562 R28.1 R24.2 3440,3482 3453.81,3468.19 3518.19,3468.19 3540,3490 R30.1
  Bottom Layer w10: v1(3417,3626) 3417,3585 v1(3423,3579)
A2: R25.2 R29.1 U6.8 | length 145.2
  Top Layer w10: U6.8 3753,3585 3780,3612 R29.1 R25.2
AREF: C11.1 U4.20 | length 79.7
  Bottom Layer w10: C11.1@4140,3155.71 4149.29,3155.71 4179.29,3185.71 U4.20
AVCC: C15.1 L2.2 U4.18 | length 74
  Bottom Layer w10: C15.1@4180,3155.71 4180,3157.25 4218.66,3195.91 U4.18
BOOT1: C21.2 D3.C U5.11 | length 699.9
  Top Layer w10: C21.2 v1(3354,4060) ; U5.11 3718.84,3799.84 3740.06,3821.06 3740.06,3850.84 3690,3900.89 v1(3690,4018.23)
  Bottom Layer w10: v1(3354,4060) 3640.06,4060 3681.83,4018.23 v1(3690,4018.23)
BOOT2: C32.2 D5.C U8.11 | length 153.9
  Top Layer w10: U8.11 3712.32,3364.84 C32.2 ; 3706.47,3365.47 3751.89,3365.47 3775.52,3341.85 D5.C
COMP1: C30.1 R37.1 U5.3 | length 89.4
  Top Layer w10: R37.1 3466.26,3778.74 C30.1 3506.42,3780.16 U5.3
COMP2: C39.1 R51.1 U8.3 | length 106.7
  Top Layer w10: R51.1 3505,3312.91 C39.1 3505.16,3345.16 U8.3
FB1: R34.2 U5.4 U6.1 | length 227
  Top Layer w10: R34.2 3504,3735 ; U6.1@3535,3626 3532,3626 3498.5,3659.5 3498.5,3729.5 3504,3735 ; U5.4 3528.33,3735.5 3504.5,3735.5 3504,3735
FB2: R36.2 U6.9 U8.4 | length 935.5
  Top Layer w10: 3431.92,3282.08 3524.92,3282.08 ; R36.2 3510,3267.17 3524.92,3282.08 ; U8.4 3524.92,3282.08 ; U6.9 3743.21,3605 3753.31,3615.09 v1(3753.31,3639.31)
  Bottom Layer w10: v1(3420,3277) 3350,3347 3350,3432 3538.5,3620.5 3562.24,3620.5 3581.05,3639.31 v1(3753.31,3639.31)
GND: "MOLEX 1.1" C1.1 C2.1 C4.1 C5.1 C6.2 C7.2 C8.1 C9.1 C10.2 C12.2 C13.1 C14.2 C15.2 C16.1 C17.1 C18.2 C19.2 C20.2 C22.2 C23.2 C25.1 C26.1 C27.2 C28.2 C29.2 C30.2 C31.2 C33.1 C34.1 C35.2 C37.2 C38.2 C39.2 C40.2 D1.A D2.2 J1.2 J2.3 J3.3 MOLEX_1.4 P4.6 Q2.2 Q4.2 Q6.1 Q6.2 Q6.3 Q8.1 Q8.2 Q8.3 R3.1 R10.1 R15.1 R16.1 R28.2 R29.2 R34.1 R35.2 R36.1 R38.2 R39.1 R42.1 R43.1 R48.1 R49.1 R52.2 R53.2 R54.1 TP2.1 U1.1 U2.1 U3.18 U3.20 U4.3 U4.5 U4.21 U4.33 U5.9 U5.16 U5.17 U6.4 U7.2 U8.9 U8.16 U8.17 U9.2 | length 3196.8
  Top Layer w10: C18.2 C19.2 ; C1.1 C2.1 ; R3.1 2542.99,2967.01 C4.1 C5.1 ; C8.1 2609.39,3519.09 C9.1 ; C29.2 2910,3165 2995,3080 C28.2 ; Q6.1 Q6.2 Q6.3 ; Q8.1 Q8.2 Q8.3 3398,3130 3408,3140 U9.2 ; C31.2@3415,3840.71 3429.29,3855 R38.2 3455,3823.03 C27.2@3463.03,3815 ; C40.2 3472.52,3330 C39.2 C38.2 ; R28.2 3491,3545 3511,3565 U6.4 ; R48.1 3500.99,3014.93 R49.1 3593.63,3060 3617.91,3084.29 R54.1 3630,3102.09 R53.2 ; C26.1 3570,3966.48 C25.1 ; U5.16 3580.47,3819.53 U5.17 ; U8.16 3595.47,3384.53 U8.17 ; 3659.53,3325.47 U8.9 ; C34.1 C33.1 C33.1@3781.46,2961.45 ; R43.1 4010,3696 R39.1 4025,3750 R35.2 ; R16.1 4028.74,3877.3 J2.3 ; R15.1 4585,2994 4605.35,2973.66 4676.35,2973.66 D1.A
  Bottom Layer w10: C7.2@2663.23,3240 2680.06,3256.83 2680.06,3257.08 2689.06,3266.08 U2.1 ; C6.2 3920,3250 C13.1 ; C13.1@3936.17,3247.48 C13.1@3943.73,3239.92 ; U4.3 4139.92,3333.74 U4.33 4179.29,3314.06 U4.5 ; J3.3 4442.48,3911.73 MOLEX_1.4 ; C17.1 4559.92,3605.05 J1.2 4666.48,3711.61 4757.69,3711.61 4769.3,3700 4769.3,3558.32 P4.6
GPIO_VN: "MOLEX 2.2" R15.2 U4.13 | length 542.8
  Top Layer w10: v1(4385,3295) 4425,3295 4541.5,3178.5 4541.5,3172.61 4557.61,3156.5 4563.5,3156.5 4585,3135 R15.2 4502.91,3122.91 4465,3085
  Bottom Layer w10: U4.13 4384.37,3294.37 v1(4385,3295)
GPIO_VP: "MOLEX 2.1" U4.14 | length 422.3
  Top Layer w10: v1(4325,3275) 4360,3240 4360,3060 4413.74,3006.26 4465,3006.26
  Bottom Layer w10: U4.14 4305.31,3274.68 ; 4305.31,3274.37 4305.63,3274.37 ; 4465,3006.26 4465,3026.2
HDRV1: Q5.4 U5.13 | length 417.2
  Top Layer w10: Q5.4 3363.34,3995 3380.34,3978 3381.85,3979.51 3383.36,3977.99 3383.99,3977.99 v1(3386,3980) ; U5.13 3639.53,3862.53 3658,3881 v1@3658,3882
  Bottom Layer w10: v1(3386,3980) 3568.97,3980 3569.46,3979.51 3603.49,3979.51 3664,3919 v1(3664,3888)
HDRV2: Q7.4 U8.13 | length 372.2
  Top Layer w10: Q7.4 v1@3404,3425 ; v1@3406,3424 v1(3406,3428) ; U8.13 3687.69,3411.69
  Bottom Layer w10: v1(3406,3428) 3683,3428 3691,3420
IN1+: CON1.2 R42.2 R43.2 U7.3 | length 518.6
  Top Layer w10: U7.3 3846.18,3763.82 R42.2 ; R43.2@3955,3690 3940,3705 R42.2 ; CON1.2 4089.21,3630.79 4078,3642 4019.89,3642 4017.39,3644.5 3994.61,3644.5 3992.11,3642 3925,3642 3905,3662 R42.2
IN2+: CON2.2 R48.2 R49.2 U9.3 | length 807.3
  Top Layer w10: U9.3 3445,3067 R49.2 3438,3014.93 R48.2 3440.6,3014.74 3475.28,2980.06 3597.95,2980.06 3629,3011.11 3819.95,3011.11 3884.77,2946.28 3997.5,2946.28 4051.11,2999.89 CON2.2
ISENS1+: C24.1 R21.1 U5.6 | length 263.5
  Top Layer w10: U5.6 3600.16,3720.16 3574,3694 C24.1 3574,3685 3598,3661 3682,3661 3696.5,3675.5 3696.5,3692.13 3727.29,3722.91 R21.1
ISENS1-: C24.2 R22.1 U5.5 | length 794
  Top Layer w10: R22.1 2857.91,3735.91 2866,3744 v1(2872,3744) ; v1(3526,3708) v1@3532.29,3708 ; C24.2@3553.29,3687 v1@3532.29,3708 ; U5.5 3555.17,3708 v1@3532.29,3708
  Bottom Layer w10: v1(2872,3744) 2884,3744 2920,3708 3416.11,3708 3418.61,3710.5 3523.5,3710.5 v1(3526,3708)
ISENS2+: C36.1 R44.1 U8.6 | length 100.3
  Top Layer w10: C36.1 R44.1 3615.16,3256.93 U8.6
ISENS2-: C36.2 R45.1 U8.5 | length 643.1
  Top Layer w10: R45.1 3051,3290 v1(3071,3270) ; v1(3529,3220.95) 3553.05,3245 C36.2 3595.47,3272.95 U8.5
  Bottom Layer w10: v1(3071,3270) 3335.89,3270 3384.94,3220.95 v1(3529,3220.95)
LDRV1: Q6.4 U5.8 | length 454.7
  Top Layer w10: Q6.4 3363.34,3750 3430.34,3683 v1(3430,3683) ; U5.8 v1(3692,3733.31)
  Bottom Layer w10: v1(3430,3683) 3437.5,3690.5 3504.61,3690.5 3514.61,3680.5 3537.39,3680.5 3568.89,3712 3684,3712 3692,3720 v1(3692,3733.31)
LDRV2: Q8.4 U8.8 | length 454.5
  Top Layer w10: Q8.4 3360.12,3188.46 3410.46,3188.46 3439.5,3217.5 3689.5,3217.5 3701,3229 3701,3252.27 U8.8@3654.96,3298.31
LED1-2-P: C25.2 C26.2 CON1.1 Q5.1 Q5.2 Q5.3 R26.1 | length 1475.5
  Top Layer w10: Q5.3 Q5.2 ; v1@3402,3895 Q5.2 ; C25.2@3437.56,3943.5 C25.2@3459.76,3965.71 ; C26.2@3457.76,4042.01 C26.2 C25.2@3459.76,3965.71 ; v1(3464,3919) 3460.15,3922.85 C25.2 C25.2@3459.76,3965.71 ; R26.1 3715,3466 3698,3449 ; v1(3745,3449) 3698,3449 ; Q5.2 Q5.1 3355.12,3808.22 3315.12,3768.22 3315.12,3566.6 3433.53,3448.19 3526.47,3448.19 3537.28,3459 3688,3459 3698,3449
  Bottom Layer w10: v1(3403,3892) 3446,3892 v1@3466,3912 ; v1(3745,3449) 3892,3449 3948,3505 CON1.1
LED3-4-P: C33.2 C34.2 CON2.1 Q7.1 Q7.2 Q7.3 R27.1 | length 1174
  Top Layer w10: R27.1 3233.17,3470.8 3262,3441.97 3306.21,3441.97 3315,3433.18 3315,3388.97 3322,3381.97 3350.32,3381.97 Q7.3 Q7.2 Q7.1 3357.28,3236.28 v1(3344,3223) ; v1@3613,3038 3649.85,3074.85 C34.2 C33.2 3781.46,3071.68 3880.89,3071.68 CON2.1
  Bottom Layer w10: v1(3344,3223) 3344,3148 3454.69,3037.31 v1(3616.31,3037.31)
LIGHT: J2.2 R16.2 U4.26 | length 1030
  Top Layer w10: J2.2 3954,3883.93 R16.2 3998.28,3839.65 4041.89,3839.65 4061.54,3820 v1(4070,3820) ; v1(4006,3617) 4006,3568.43 4005,3567.43 4033.5,3538.93 4033.5,3471.07 4000,3437.57 4000,3215 4015,3200 v1(4040,3200)
  Bottom Layer w10: v1(4006,3617) 4006,3681 4070,3745 v1(4070,3820) ; v1(4040,3200) v1@4046.72,3200 ; 4055,3205 4055,3231.1 U4.26
MISO: P4.1 R11.1 | length 291.6
  Bottom Layer w10: R11.1 4616.76,3284.69 4630.9,3284.69 4639.69,3275.9 4639.69,3218.58 4616.5,3195.39 4616.5,3172.61 4670.09,3119.02 P4.1 P4.1@4725,3125.53
MOSI: P4.4 R9.1 | length 123.3
  Bottom Layer w10: R9.1 4714.24,3345.26 P4.4
NetC1_2: C1.2 C2.2 C23.1 Q1.5 U5.7 | length 1381.5
  Top Layer w10: C1.2 C2.2 2580,3797.87 Q1.5 2741,3695 2755,3681 v1@2845,3681 ; U5.7 3619.84,3703.68 3637.52,3686 C23.1
  Bottom Layer w10: v1(2850,3682) 3392.11,3682 3418.61,3655.5 3516.93,3655.5 3521.93,3660.5 3545.68,3660.5 3564.48,3679.31 3616.31,3679.31 v1@3617,3680
  other v1: 3627,3687
NetC3_1: C3.1 L1.2 U1.2 | length 934.1
  Top Layer w10: C3.1@2523.23,3070 2630.79,3070 2687.29,3126.5 2850.5,3126.5 2866.5,3110.5 L1.2 ; 2759.71,3126.5 2824.49,3191.27 2824.49,3516.32 2814,3526.81 2780.94,3526.81 U1.2
NetC3_2: C3.2 U1.6 | length 551.9
  Top Layer w10: C3.2@2499.29,3070 2499.29,3082.12 2508.08,3090.91 2580.91,3090.91 2690,3200 U1.6
NetC14_1: C14.1 U3.10 | length 88.7
  Bottom Layer w10: C14.1 3696.74,3024 3722.95,3024 U3.10
NetC21_1: C21.1 L3.2 | length 403.7
  Top Layer w10: L3.2 3039.06,4039.06 3060,4060 C21.1
NetC22_1: C22.1 D3.A R23.1 | length 240.1
  Top Layer w10: C22.1@3742,3990.29 3743,3989.29 D3.A 3760.06,3920.8 3760.06,3768.23 R23.1 R23.1@3750.83,3765
NetC31_1: C31.1 R37.2 | length 45.9
  Top Layer w10: C31.1 3415,3794.17 R37.2
NetC35_1: C35.1 D5.A R46.1 | length 171.9
  Top Layer w10: R46.1 3780,3305 3795,3290 D5.A 3806.85,3248.15 3828.23,3226.77 C35.1@3850,3226.77
NetC40_1: C40.1 R51.2 | length 43.9
  Top Layer w10: C40.1@3435,3309.29 3439.29,3305 R51.2
NetD1_C: "MOLEX 1.2" D1.C Q3.3 | length 1568.9
  Top Layer w10: v1@3256,2974 v1(3251,2979) 3441,2979 3487,2933 3561,2933 ; 4138.77,2919 4142.53,2922.76 4308.75,2922.76 4377.84,2991.84 ; 4277.13,3092.56 4377.84,2991.84 ; D1.C 4424.69,2945 4377.84,2991.84
  Bottom Layer w10: Q3.3 3115.98,3236.02 3251,3101 v1(3251,2979)
  other v1: 4208,2922
NetD2_1: D2.1 R5.1 | length 45.8
  Bottom Layer w10: R5.1 4441.24,3352.06 D2.1
NetD4_1: D4.1 R33.1 | length 49.2
  Top Layer w10: R33.1 3629.09,4015.91 D4.1
NetD4_2: D4.2 U5.14 | length 104.4
  Top Layer w10: U5.14 3619.84,3883.84 3632,3896 D4.2
NetD6_1: D6.1 R47.1 | length 85.3
  Top Layer w10: R47.1 3807.91,3382.16 D6.1
NetD6_2: D6.2 U8.14 | length 257.4
  Top Layer w10: U8.14 3634.84,3433.16 3823.84,3433.16 D6.2
  other v1: 3686,3420
NetL3_1: L3.1 R19.2 R20.2 R22.2 | length 464.5
  Top Layer w10: v1(2782,3725) R22.2 ; v1@2784.63,3814.37 R19.2 ; R20.2 R19.2 ; L3.1 2844.35,3895 R19.2
  Bottom Layer w10: v1(2782,3725) v1(2782,3809)
NetL4_1: L4.1 R40.2 R41.2 R45.2 | length 454.7
  Top Layer w10: R41.2@2926.76,3683.48 R40.2 2885.47,3580.71 L4.1 2885.47,3396.61 R45.2
NetQ1_4: Q1.4 Q2.3 R1.1 | length 120.7
  Top Layer w10: Q2.3 2405,3694.17 R1.1 2463.54,3699.17 Q1.4
NetQ2_1: Q2.1 U4.10 | length 2654.4
  Top Layer w10: Q2.1 2379,3220 2452,3147 2452,2936 2465.24,2922.76 3356.65,2922.76 3381,2947.11 v1(3381,2951)
  Bottom Layer w10: v1(3381,2951) 3840.14,2951 3994.57,3105.43 4012,3105.43 U4.10
NetQ3_1: Q3.1 Q4.3 R4.2 | length 190.3
  Bottom Layer w10: Q4.3 2640,3200 2671.81,3168.19 R4.2 2766.81,3168.19 2780,3181.38 Q3.1
NetQ4_1: Q4.1 U4.9 | length 2348.3
  Top Layer w10: v1(4180,2951) 4180,3175 4355,3350 v1(4355,3369)
  Bottom Layer w10: Q4.1 2804.24,2922.76 4167.76,2922.76 4180,2935 v1(4180,2951) ; U4.9 4350.89,3373.11 v1(4355,3369) v1@4355,3360
NetR7_1: R7.1 U4.30 | length 528.1
  Top Layer w10: v1@4035,3350 v1(4035,3355) 4035,3390.38 4153,3508.38 4153,3725.64 4160,3732.64 R7.1 R7.1@4144.69,3736.69
  Bottom Layer w10: v1(4035,3355) 4056.26,3333.74 U4.30
NetR8_1: R8.1 U4.31 | length 431.3
  Top Layer w10: v1(4055,3670) 4110,3725 R8.1
  Bottom Layer w10: v1(4055,3670) 4055,3377.32 U4.31
NetR9_2: R9.2 U4.15 | length 322
  Bottom Layer w10: U4.15 4430,3255 ; 4430,3255.32 4445.31,3255.32 4508.5,3318.5 4508.5,3321.16 4532.61,3345.26 R9.2
NetR10_2: R10.2 U3.9 | length 53.3
  Bottom Layer w10: U3.9 3755.87,3014.68 R10.2
NetR11_2: R11.2 U4.16 | length 308
  Bottom Layer w10: U4.16 4457.95,3235.32 4507.32,3284.69 4532.61,3284.69 R11.2
NetR12_2: R12.2 U4.17 | length 332.2
  Bottom Layer w10: U4.17 4528.66,3213.66 4542.01,3227.01 R12.2
NetR13_2: R13.2 U4.27 | length 162.2
  Bottom Layer w10: R13.2 3940,3290 3955.32,3274.68 U4.27
NetR14_2: R14.2 U4.28 | length 93.3
  Bottom Layer w10: R14.2 4000.63,3294.37 U4.28
NetR32_1: R32.1 R39.2 U7.4 | length 109.7
  Top Layer w10: U7.4 3971.18,3763.82 3975,3760 ; R39.2 3975,3735.83 3975,3760 ; R32.1 3975,3760
NetR50_1: R50.1 R54.2 U9.4 | length 108.9
  Top Layer w10: U9.4 3539.06,3132.09 R50.1 3580,3092.09 R54.2
NetU1_5: U1.5 U4.11 | length 1797.3
  Top Layer w10: U1.5 2700.79,3526.81 2723.06,3526.81 2737.4,3512.47 2737.4,3473.58 2786,3424.98 v1(2786,3349)
  Bottom Layer w10: v1(2786,3349) 3295,3349 3403,3241 3724,3244 3813.74,3333.74 U4.11
OUT_AMPF1: R32.2 R35.1 U4.23 U7.1 | length 1166.9
  Top Layer w10: R35.1 4022.09,3815 R32.2 3949.94,3840.06 3860.06,3840.06 U7.1 3808.47,3815 3793,3799.53 3793,3693.42 3816.11,3670.31 3845.69,3670.31 3948.35,3567.65 3948.07,3567.36 3948.07,3214.14 3995.26,3166.95 4083.05,3166.95 v1(4090,3160)
  Bottom Layer w10: v1(4090,3160) 4105,3160 4120.24,3175.24 U4.23
OUT_AMPF2: R50.2 R53.1 U4.24 U9.1 | length 764.7
  Top Layer w10: U9.1 3445,3179 3459,3193 3561,3193 3580,3174 R50.2 3627.09,3167.91 R53.1 3630,3168.89 3658.61,3197.5 3766.62,3197.5 3824.12,3140 v1@4025,3140
  Bottom Layer w10: v1(4020.55,3139.45) 4026.34,3139.45 U4.24
RESET: C13.2 J1.1 P4.5 R6.1 U4.29 | length 1271.2
  Top Layer w10: v1(4035,3240) 4035,3284 ; v1(4035,3320) 4035,3284 ; v1(4633,3405) 4234,3405 4113,3284 4035,3284
  Bottom Layer w10: R6.1@4006.18,3190.26 4006.72,3190.8 4006.72,3239.92 4039.92,3239.92 4039.84,3240 v1(4035,3240) ; v1(4035,3320) 4040.94,3314.06 U4.29 ; v1(4633,3405) 4663,3435 P4.5 4640,3520 4640,3595 4710.11,3665.11 J1.1
RT/CLK1: R38.1 U5.1 | length 77
  Top Layer w10: R38.1 3518.27,3855 U5.1@3553.31,3819.96
RT/CLK2: R52.1 U8.1 | length 72.8
  Top Layer w10: R52.1 3533.27,3420 U8.1@3568.31,3384.96
RX_MCU: MOLEX_1.2 R7.2 | length 231.8
  Top Layer w10: R7.2 4160,3870 MOLEX_1.2
SCK: P4.3 R12.1 | length 736.2
  Bottom Layer w10: R12.1 4605,3212.18 4596.5,3203.68 4596.5,3072.05 4597.12,3071.43 4597.12,2987.88 4611.35,2973.66 4694.9,2973.66 4786.31,3065.06 4786.31,3215.7 P4.3
SCL: R14.1 R18.1 U3.23 U6.6 | length 1045.4
  Top Layer w10: U6.6 3782.09,3470.91 R18.1
  Bottom Layer w10: v1(3751,3496) 3755,3500 3855,3500 3905,3550 4022.43,3550 4033.5,3538.93 4033.5,3474.06 4035,3472.57 3967.43,3405 3965.58,3405 ; U3.23 3771.62,3326.62 3850.5,3405.5 3965.08,3405.5 3965.58,3405 ; R14.1@3974.69,3383.31 R14.1 3990,3380.58 3965.58,3405
SDA: R13.1 R17.1 U3.24 U6.7 | length 700.3
  Top Layer w10: U6.7 3732.09,3565 3759.54,3537.54 ; R17.1 3759.54,3537.54 ; v1(3920,3378) 3920,3454.45 3913,3461.45 3825.45,3549 3771,3549 3759.54,3537.54
  Bottom Layer w10: U3.24 3787.37,3217.37 R13.1 3905,3370 3913,3378 v1(3920,3378)
SERVO_PWM: J3.1 U4.1 | length 411
  Bottom Layer w10: U4.1@4099.33,3394.76 4099.33,3411.3 4190.24,3502.2 4190.24,3552.17 4279.64,3641.57 J3.1
SS1: C27.1 U5.2 | length 75.8
  Top Layer w10: C27.1 3515,3815 3530.16,3799.84 U5.2
SS2: C38.1 U8.2 | length 69.6
  Top Layer w10: C38.1 3520.16,3364.84 U8.2
STATUS_LED: R5.2 U4.12 | length 235.7
  Bottom Layer w10: U4.12 4279.06,3314.06 4287.5,3322.5 4457.5,3322.5 4475,3340 R5.2
SW1: Q5.5 Q5.6 Q5.7 Q5.8 Q5.9 Q6.5 Q6.6 Q6.7 Q6.8 Q6.9 U5.12 | length 1240.2
  Top Layer w10: Q6.8 Q6.7 Q6.6 ; Q5.5 Q5.6 Q5.7 ; Q5.9@3197.83,3895 Q5.7 ; Q6.9 3197.83,3700 Q6.6 ; Q5.9 3222.83,3940.83 3304.01,4022.01 3406.99,4022.01 3413.27,4015.73 3413.27,3998.35 3413.65,3997.97 3413.65,3944.89 3413.27,3944.5 3413.27,3924.83 3446.6,3891.5 3539.5,3891.5 v1(3542,3894) ; U5.12 3689.5,3842.33 v1(3689.5,3860.5) ; Q6.6 Q6.5 Q5.8 Q5.7
  Bottom Layer w10: v1(3542,3894) 3619.11,3894 3652.61,3860.5 v1(3689.5,3860.5)
SW2: C32.1 L4.2 Q7.5 Q7.6 Q7.7 Q7.8 Q7.9 Q8.5 Q8.6 Q8.7 Q8.8 Q8.9 U8.12 | length 554.7
  Top Layer w10: L4.2 3059.53,3425 Q7.5 Q7.6 Q7.7 Q7.8 3142.13,3182.83 Q8.5 Q8.6 Q8.7 Q8.8 ; U8.12 3714.53,3384.53 C32.1
TX_MCU: MOLEX_1.3 R8.2 | length 455.4
  Top Layer w10: R8.2 4110,3973.1 4173.47,4036.57 4322.17,4036.57 MOLEX_1.3
V_BAT: C7.1 C8.2 C9.2 Q1.1 Q1.2 Q1.3 Q3.2 R1.2 R4.1 TP1.1 U1.3 U2.2 | length 1421.5
  Top Layer w10: TP1.1 2345,3845 Q1.1 Q1.2 Q1.3 ; R1.2 2457.72,3735 Q1.3 ; v1(2435,3513.19) 2430.09,3518.09 C9.2 C9.2@2526.26,3491.98 ; C9.2@2499.76,3530 2499.15,3530.61 C8.2 2499.15,3610.09 2507.72,3610.09 2507.72,3683 ; U1.3 2779.7,3622.25 2733.95,3667.99 2656.58,3667.99 2656.05,3668.53 2528.29,3668.53 2513.82,3683 2507.72,3683 ; Q1.3 2475.94,3745 2507.72,3713.22 2507.72,3683
  Bottom Layer w10: v1(2435,3513.19) 2435,3482 2450,3467 2576,3467 2638,3405 ; U2.2 2630,3249.29 C7.1@2639.29,3240 ; R4.1 2755.61,3272.05 Q3.2
V_BAT_SW: C37.1 R19.1 R20.1 R21.2 R40.1 R41.1 R44.2 U8.7 | length 2121.9
  Top Layer w10: R20.1 R19.1 2750,3879.11 2750,3784 2761,3773 2844.37,3773 2845.64,3771.73 2966.27,3771.73 R41.1 R40.1 3103,3556 v1@3192.26,3556 ; 2913.19,3698.19 2925,3710 2926.91,3710 ; U8.7 3634.84,3273.07 R44.2 ; v1@3732.91,3663.91 R21.2@3732.91,3680 ; R21.2 3767.91,3687.09 3772,3683 ; C37.1@3772,3702.77 3772,3683 ; v1@3807,3651.14 3802.77,3646.91 v1(3802.77,3644.77) 3772,3675.53 3772,3683
  Bottom Layer w10: v1(3191,3548) 3344.11,3548 3369.61,3573.5 3392.39,3573.5 3417.89,3548 3437.72,3548 3530.22,3640.5 3553.96,3640.5 3572.77,3659.31 v1@3732,3659.31 ; v1@3685,3264.05 3714,3293.05 3714,3556 v1(3802.77,3644.77)
  other v1: 3677,3256 3724,3667
VCC1: R23.2 U5.10 | length 56.5
  Top Layer w10: U5.10 3706.3,3780.16 R23.2
VCC2: R46.2 U8.10 | length 55.1
  Top Layer w10: U8.10 3730.67,3345.16 R46.2
VFB: R2.1 R3.2 U1.4 | length 899.6
  Top Layer w10: R3.2 R2.1 2499.17,3049.09 2490.6,3049.09 2479.29,3060.4 2479.29,3178.08 2546.26,3245.05 2546.26,3635.11 2559.14,3647.99 2571.14,3647.99 2571.68,3648.53 2647.1,3648.53 2691,3604.62 2691,3576 U1.4
W1: R26.2 R30.2 U6.10 | length 225.5
  Top Layer w10: R26.2 R30.2 3642.91,3608.91 3658,3624 U6.10
W2: R27.2 R31.2 U6.3 | length 327.6
  Top Layer w10: R27.2 3330,3503 v1(3333,3506) ; v1(3381,3546) 3395.12,3560.12 3395.12,3588.12 3405.5,3598.5 3449.96,3598.5 3458.29,3590.17 R31.2 3494.61,3590.17 3499.79,3585 U6.3
  Bottom Layer w10: v1(3333,3506) 3341,3506 v1(3381,3546)
XTAL1: C16.2 OSC1.1 U4.7 | length 168.5
  Bottom Layer w10: U4.7 4218.66,3457.02 C16.2 4263.28,3463.28 OSC1.1
XTAL2: C17.2 OSC1.2 U4.8 | length 386.6
  Bottom Layer w10: U4.8 4304.76,3394.76 4415,3505 OSC1.2 4513.2,3505 C17.2
pads on no net: Q1.6 Q1.7 Q1.8 Q1.9 U3.2 U3.3 U3.4 U3.5 U3.6 U3.7 U3.11 U3.12 U3.14 U3.15 U3.16 U3.17 U3.19 U3.21 U3.22 U4.2 U4.19 U4.22 U4.25 U4.32 U5.15 U5.18 U8.15 U8.18
copper on no net: | length 672.1
  Top Layer w10: 3561,2933 3575,2919 3576,2919 4118,2919 4138.77,2919 ; 3610,3790 3639.53,3760.47 ; 3625,3355 3630,3355 3659.53,3325.47

## Polygon pours and split planes (outlines as drawn)
3V3 on Top Layer "3V3" (solid, pour order 38): 2253.02,4106.43 2265,4094.45 4798,4094.45 4798,2898.45 4791,2891.45 2250,2891.45
GND on Bottom Layer "GND" (solid, pour order 40): 2250,4096 4810,4096 4813,4093 4810,4090 4810,2890 2251,2890 2248,2892.99

## Keep-outs
Keep-Out Layer:
  lines w5.51: 2245,3042.79 ccw(c2383.45,3043.45) 2382.8,2905 4666.26,2905 ccw(c4665.61,3043.45) 4804.06,3042.79 4804.06,3948.31 ccw(c4665.61,3947.65) 4666.26,4086.1 2382.8,4086.1 ccw(c2383.45,3947.65) 2245,3948.31 2245,3042.79
  lines w20: 4185,3138 4189,3142

## Other copper
Top Layer:
  pour cut-out: 3872,3549 3872,3583 3862,3593 3813,3593 3813,3504 3815,3506 3873,3506

## Silkscreen, mask and mechanical layers (free items; w line width, h text height)
Top Overlay:
  text "Sigmoid" at 4294,3492 h60
  text "Novi Sad,Serbia" at 4294,3405 h30
Mechanical 1:
  lines w5.51: 2245,3042.79 ccw(c2383.45,3043.45) 2382.8,2905 4666.26,2905 ccw(c4665.61,3043.45) 4804.06,3042.79 4804.06,3948.31 ccw(c4665.61,3947.65) 4666.26,4086.1 2382.8,4086.1 ccw(c2383.45,3947.65) 2245,3948.31 2245,3042.79
Mechanical 2:
Mechanical 3:

## Text inside footprints (layer, text, board x,y; h text height)
U6: Top Overlay "*" at 3503,3631 h50; Mechanical 13 "*" at 3503,3631 h50